# Altium PCB BuckDev.PcbDoc
Units mil, origin at the board's own origin, x right, y up, seen from the top; angles counter-clockwise.
Board outline 1705 x 1603 mil, 2 copper layers (Top Layer, Bottom Layer); 15 components, 6 nets, 37 pads, 197 vias.
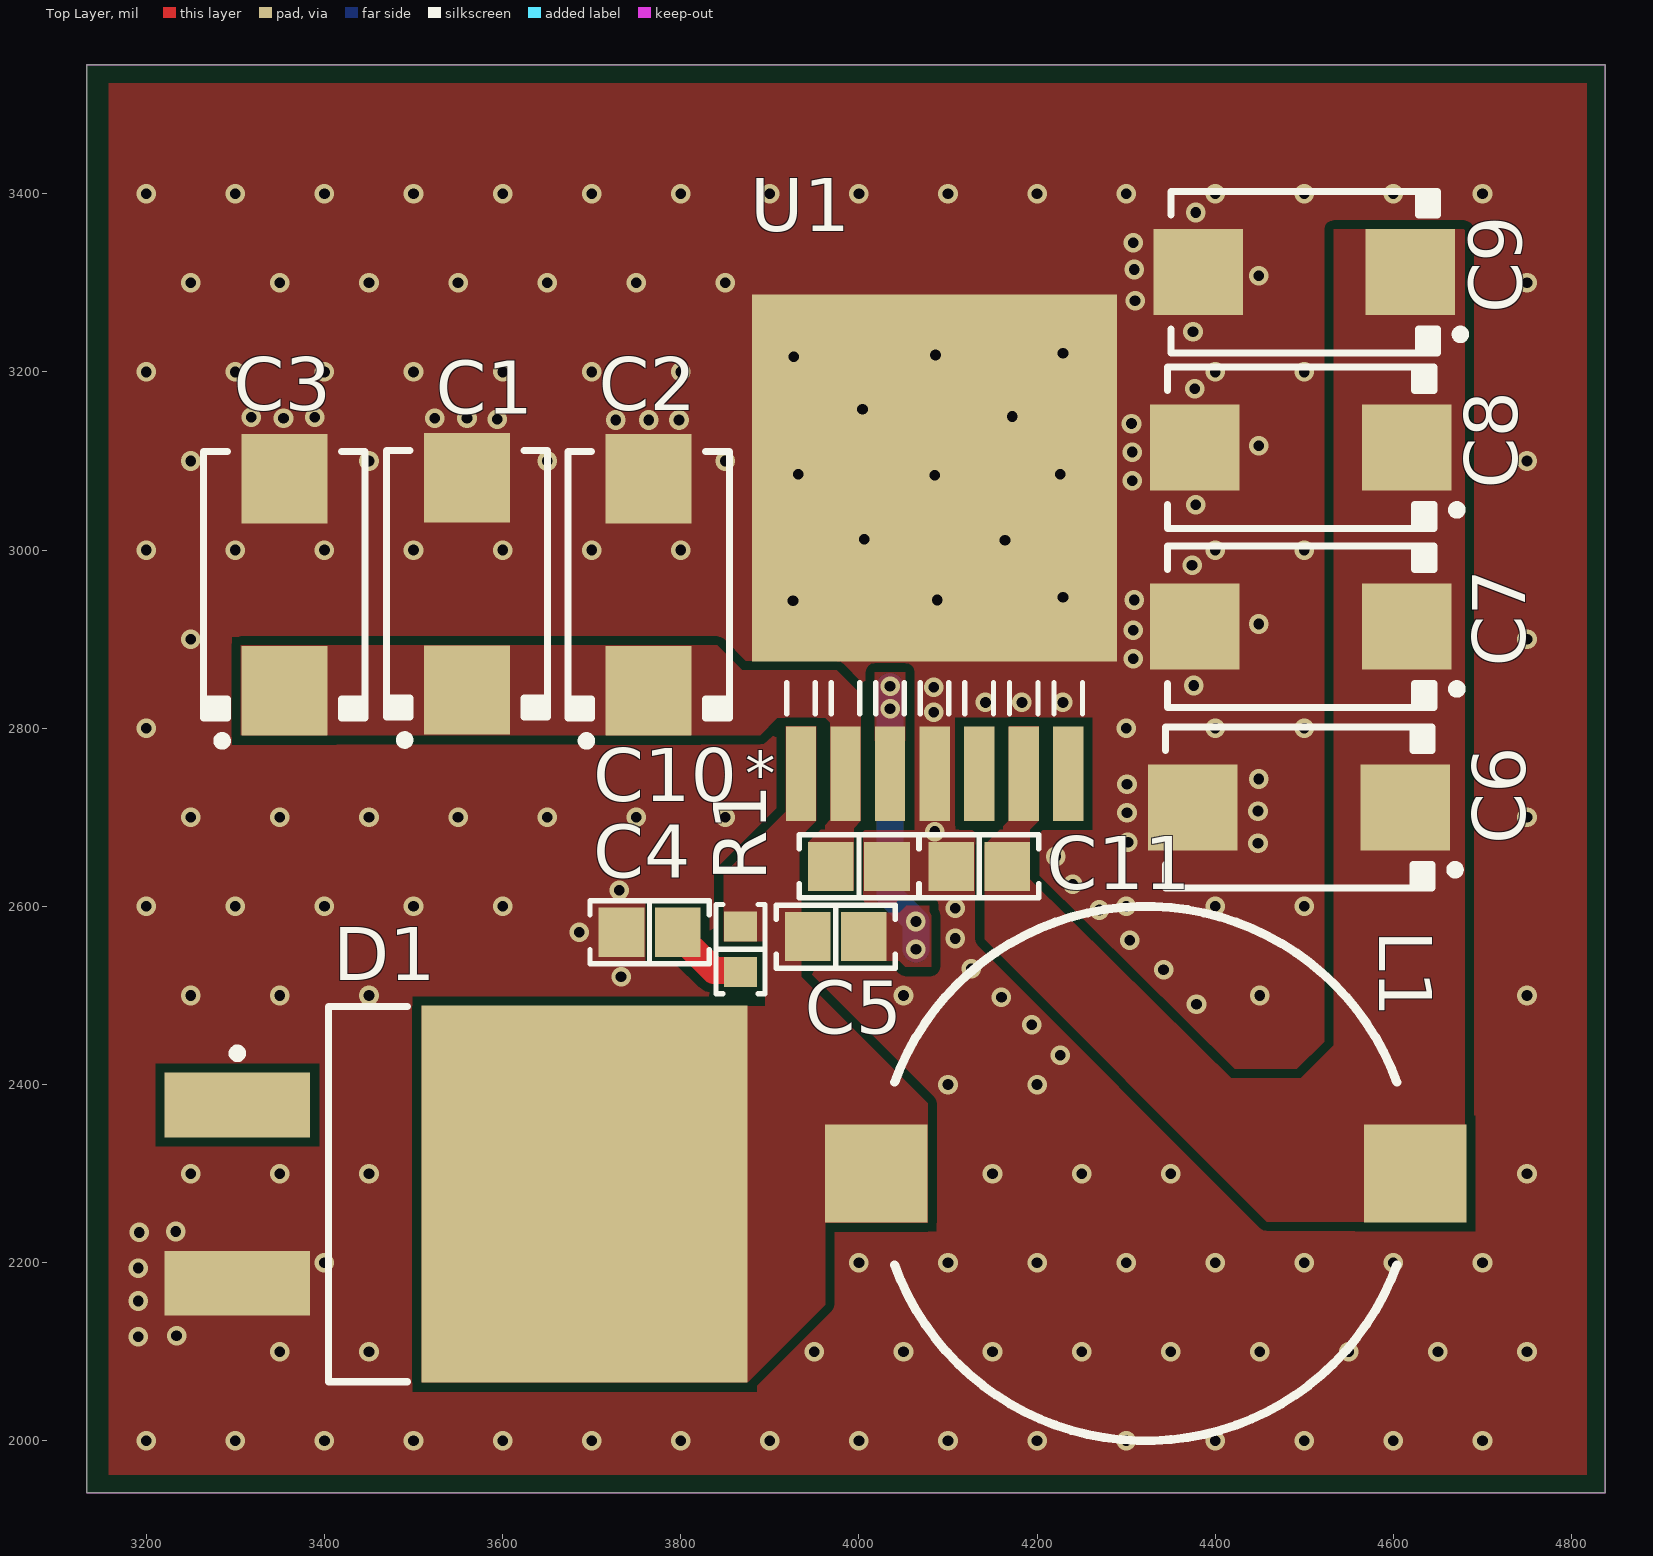
[diagram p0: Top Layer view]
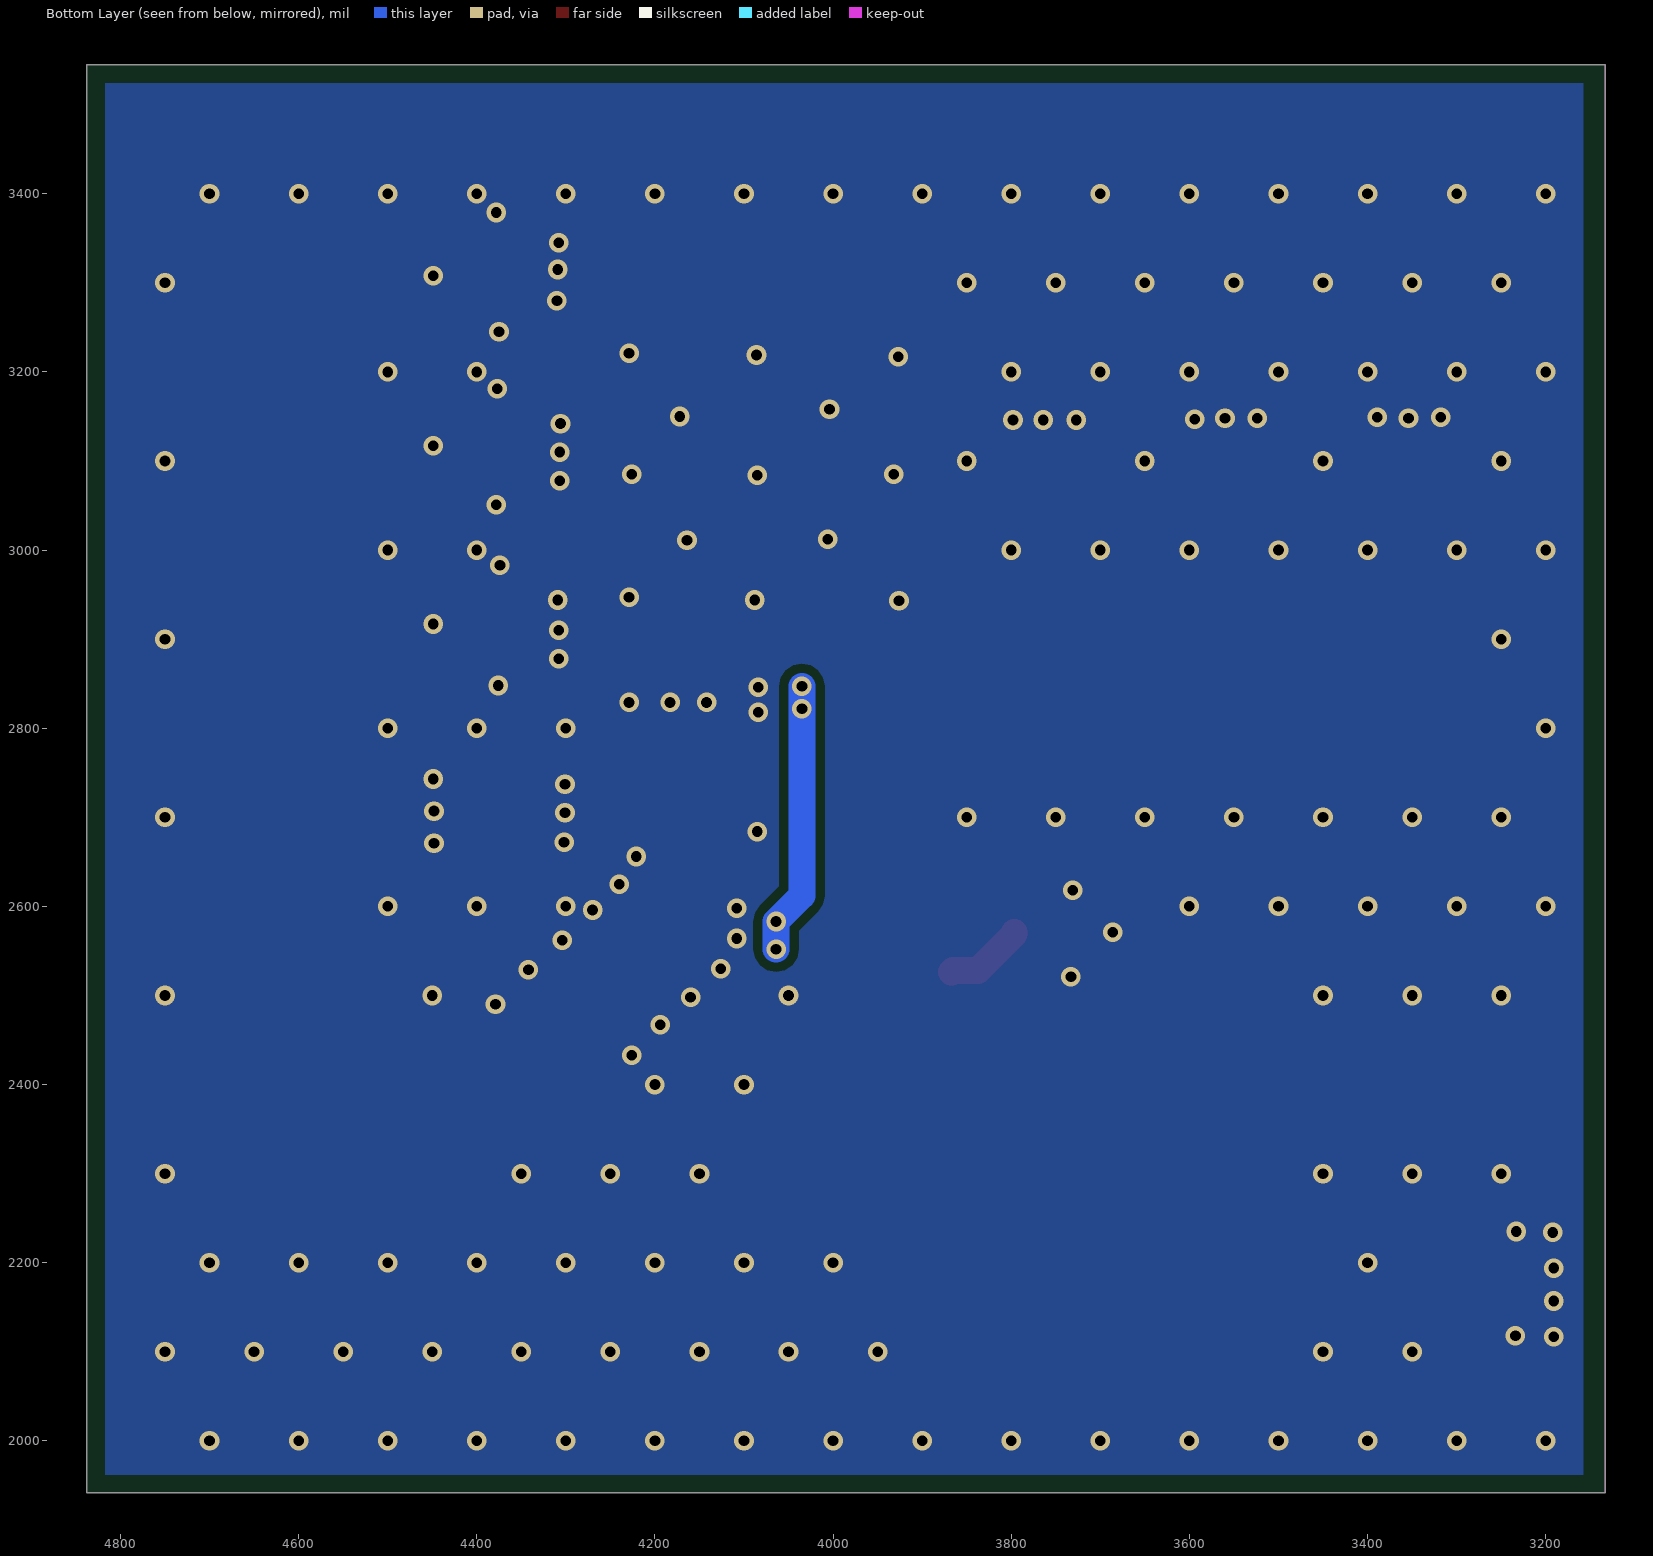
[diagram p1: Bottom Layer view, seen from below]
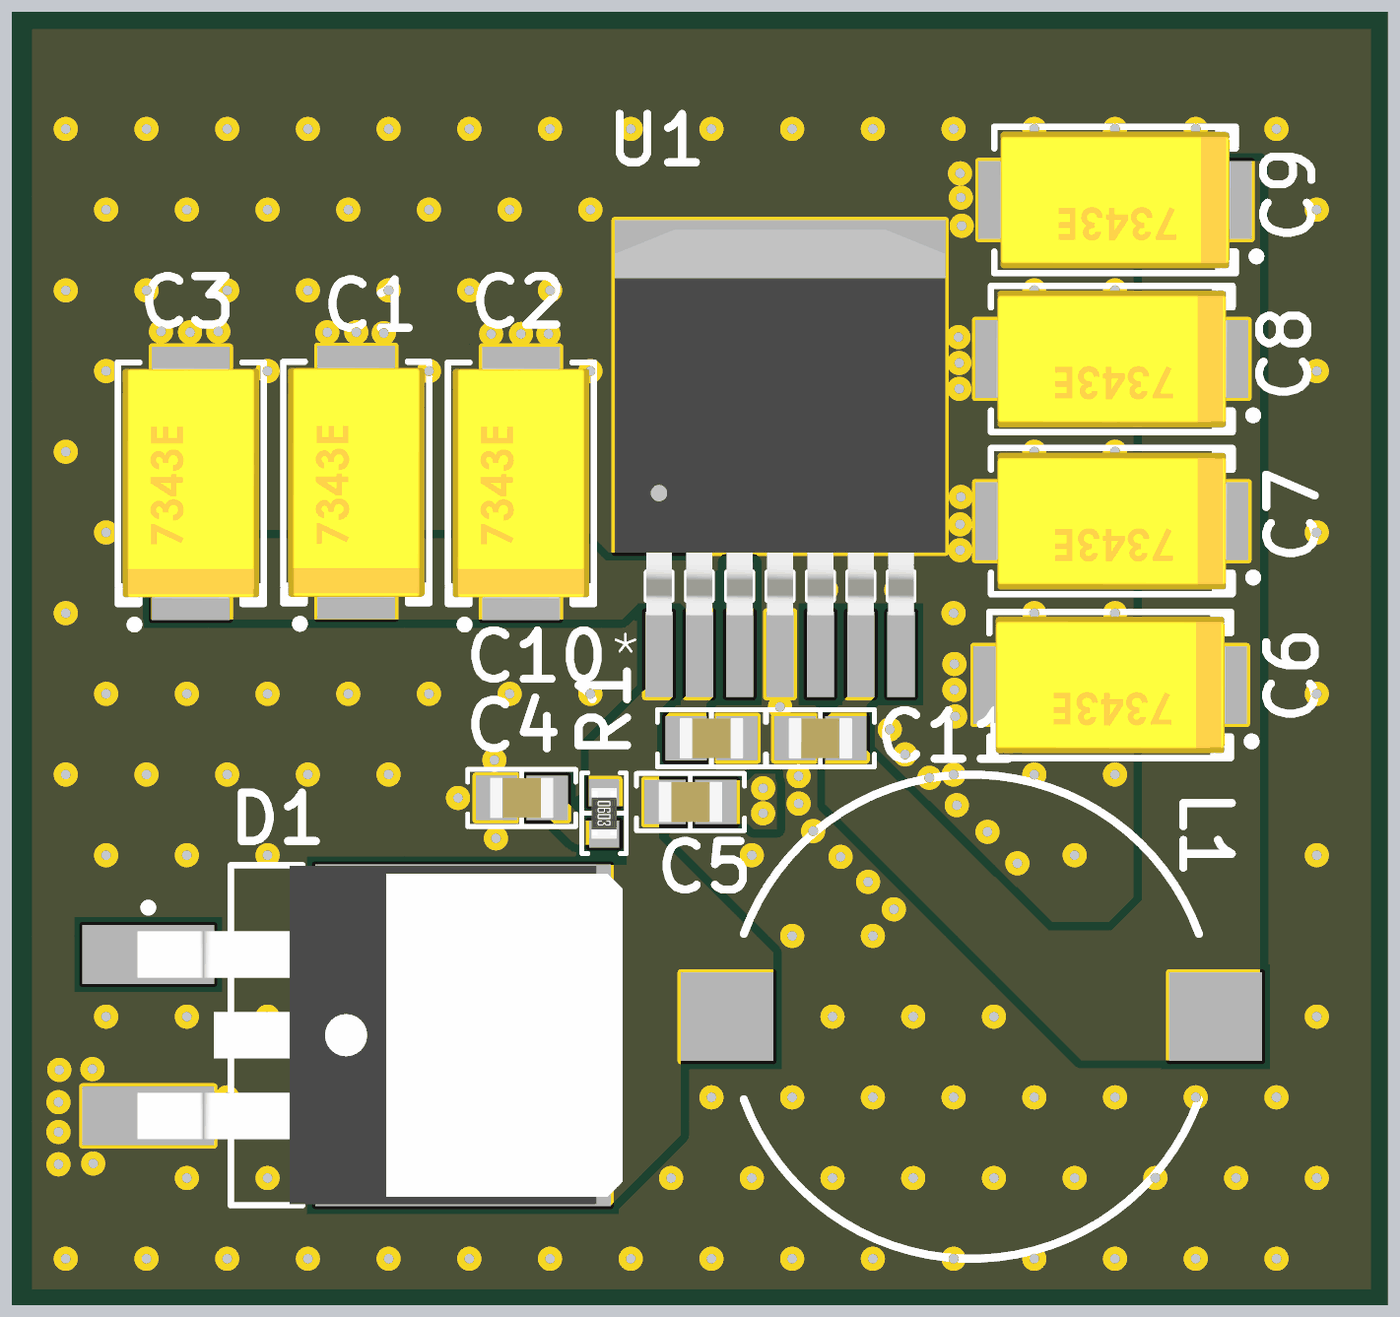
[diagram p2: 3D render of the assembled board from above, using the file's embedded part models]

## Layer stack, top to bottom
Top Solder: solder mask 0.4, Solder Resist, Dk 3.5
Top Layer: signal copper 1.4
Dielectric 1: dielectric 12.6, FR-4, Dk 4.8
Bottom Layer: signal copper 1.4
Bottom Solder: solder mask 0.4, Solder Resist, Dk 3.5

## Board outline
3133,1942 4838,1942 4838,3545 3133,3545

## Design rules (kind name [scope] priority, off if disabled: settings)
Clearance [All] p1: gap=10 ignorepadtopadclearanceinfootprint=FALSE except(0: Arc-Hole Track-Hole SMDPad-Hole THPad-Hole Via-Hole Fill-Hole Poly-Hole Region-Hole Text-Hole)
PlaneConnect [All] p1: planeconnectstyle=Direct reliefexpansion=20 reliefentries=4 reliefconductorwidth=10 reliefairgap=10
PolygonConnect [All] p1: connectstyle=Direct reliefconductorwidth=10 reliefentries=4 polygonreliefangle="90 Angle" airgapwidth=10
RoutingVias [All] p1: holewidth=28 width=50 viastyle="Through Hole" minholewidth=28 minwidth=50 maxholewidth=28 maxwidth=50
SolderMaskExpansion [All] p1: expansion=4 istentingtop=FALSE
Width [All] p1: maxlimit=100 minlimit=10 preferedwidth=10 minimp=50.000000 maximp=50.000000 favimp=50.000000
29 further rules are at their usual default settings.

## Classes and differential pairs
component class BuckCircuit: C1 C2 C3 C4 C5 C6 C7 C8 C9 C10 D1 R1 U1

## Components (designator, comment, footprint, x,y, rotation, side; value= is the part's Value field where it differs from the comment)
C1 "68 µF" "CAP POL 2917_7343" 3560,2962 r90 top
C2 "68 µF" "CAP POL 2917_7343" 3764,2961 r90 top
C3 "68 µF" "CAP POL 2917_7343" 3355,2961 r90 top
C4 "10000 pF" "CAP 0805_2012" 3765,2571 r180 top
C5 "10000 pF" "CAP 0805_2012" 3974,2566 r0 top
C6 "100 µF" "CAP POL 2917_7343" 4494,2711 r180 top
C7 "100 µF" "CAP POL 2917_7343" 4496,2914 r180 top
C8 "100 µF" "CAP POL 2917_7343" 4496,3115 r180 top
C9 "100 µF" "CAP POL 2917_7343" 4500,3312 r180 top
C10 "10000 pF" "CAP 0805_2012" 4000,2645 r180 top
C11 "10000 pF" "CAP 0805_2012" 4135,2645 r0 top
D1 "6TQ045S" "DPAK 6TQ045S" 3548.3,2277 r0 top
L1 "DO5022P-103MLD" DO5022P-103MLD 4322,2300 r0 top
R1 "1 kOhms" "RES 0603_1608" 3867,2552 r270 top
U1 "LM2677SX-5.0/NOPB" TS7B 4085,3075 r0 top

## Footprints (in the part's own frame and the unit in brackets; to place one, negate y for a bottom-side part, rotate by r counter-clockwise, add the part's x,y. Pads: shape width x height; smd on the part's side, far side on the other; paste and mask are expansions set on the pad)
"CAP 0805_2012" [mm] "Chip Capacitor, 2-Leads, Body 2.00x1.20mm, IPC Medium Density"
  rect 1.3x1.4 smd: 1(-0.8,0) 2(0.8,0)
  silkscreen extent -1.7,-0.9 1.7,0.9, body extent -1,-0.64 1,0.64, height 1.26
"CAP POL 2917_7343" [mm] "Molded Capacitor, 2-Leads, Body 7.30x4.30mm, IPC Medium Density"
  rect 2.55x2.45 smd: 1(-3.025,0) 2(3.025,0)
  silkscreen extent -4.57,-2.3 3.8,2.3, body extent -3.65,-2.15 3.65,2.15, height 4.1
DO5022P-103MLD [mm] "10uH"
  rect 2.92x2.79 smd: 1(-7.685,0) 2(7.685,0)
  silkscreen extent -7.16,-7.62 7.16,7.62
"DPAK 6TQ045S" [mm] "D2-PAK, 3-Pads, Body 7.93x8.70mm (max), IPC Medium Density"
  rect 4.15x1.85 smd: 1(-6.25,2.54) 3(-6.25,-2.54)
  rect 9.3x10.75 smd: 2(3.65,0)
  silkscreen extent -6.37,-5.35 -1.4,5.35, body extent -6.59,-5.33 8.67,5.33, height 0.6
"RES 0603_1608" [mm] "Chip Resistor, 2-Leads, Body 1.60x0.80mm, IPC Medium Density"
  rect 0.85x0.95 smd: 1(-0.65,0) 2(0.65,0)
  silkscreen extent -1.27,-0.7 1.27,0.7, body extent -0.8,-0.4 0.8,0.4, height 0.45
TS7B [mil]
  rect 34x106 smd: 1(-150,-326) 2(-100,-326) 3(-50,-326) 4(0,-326) 5(50,-326) 6(100,-326) 7(150,-326)
  rect 410x412 smd: 8(0,6)
  silkscreen extent -166,-259 166,-224, body extent -205,-278 205,200, height 189

## Part data
C1 C2 C3: library part T495D686K020ATE150, "CAP TANT 68UF 10% 20V 2917", Device Package="2917 (7343 Metric)", ESR (Equivalent Series Resistance)=150mOhm, Lifetime @ Temp.="2000 Hrs @ 85°C", Manufacturer=KEMET, Manufacturer Size Code=D, Operating Temperature="-55°C ~ 125°C", Supplier Part Number 1=399-3890-1-ND, Tolerance=±10%, Voltage - Rated="20 V", Capacitance="68 µF", ComponentLink1Description=Datasheet, ComponentLink1URL=https://api.kemet.com/component-edge/download/datasheet/T495D686K020ATE150.pdf, ComponentLink2Description="DigiKey Link", ComponentLink2URL=https://www.digikey.com/en/products/detail/kemet/T495D686K020ATE150/818751, Features="General Purpose", Height - Seated (Max)="0.122\" (3.10mm)", LastUpdated="2022-07-10 9:38:15 AM", Lifecycle Status=Active, Minimum Order=1, Mounting Type="Surface Mount", Package / Case="2917 (7343 Metric)", Packaging=TapeAndReel, Part Number=T495D686K020ATE150, Part Status=Active, PartId=3098, Price=0.71, Series=T495, Size / Dimension="0.287\" L x 0.169\" W (7.30mm x 4.30mm)", Supplier 1=DigiKey, Type=Molded
C4 C5 C10 C11: library part C0805X103J5RACAUTO, "CAP CER 10000PF 50V X7R 0805", Device Package="0805 (2012 Metric)", Manufacturer=KEMET, Operating Temperature="-55°C ~ 125°C", Ratings=AEC-Q200, Supplier Part Number 1=399-C0805X103J5RACAUTOCT-ND, Temperature Coefficient=X7R, Tolerance=±5%, Voltage - Rated=50V, Applications="Automotive, Boardflex Sensitive", Capacitance="10000 pF", ComponentLink1Description=Datasheet, ComponentLink1URL=https://api.kemet.com/component-edge/download/datasheet/C0805X103J5RACAUTO.pdf, ComponentLink2Description="DigiKey Link", ComponentLink2URL=https://www.digikey.com/en/products/detail/kemet/C0805X103J5RACAUTO/6097192, Features="Soft Termination", LastUpdated="2022-06-30 10:06:02 PM", Lifecycle Status=Active, Minimum Order=1, Mounting Type="Surface Mount, MLCC", Package / Case="0805 (2012 Metric)", Packaging=TapeAndReel, Part Number=C0805X103J5RACAUTO, Part Status=Active, PartId=32207, Price=0.10, Series="SMD Auto X7R Flex", Size / Dimension="0.079\" L x 0.049\" W (2.00mm x 1.25mm)", Supplier 1=DigiKey, Thickness (Max)="0.039\" (0.98mm)"
C6 C7 C8 C9: library part T495D107M016ATE100, "CAP TANT 100UF 20% 16V 2917", Device Package="2917 (7343 Metric)", ESR (Equivalent Series Resistance)=100mOhm, Lifetime @ Temp.="2000 Hrs @ 85°C", Manufacturer=KEMET, Manufacturer Size Code=D, Operating Temperature="-55°C ~ 125°C", Supplier Part Number 1=399-5262-1-ND, Tolerance=±20%, Voltage - Rated="16 V", Capacitance="100 µF", ComponentLink1Description=Datasheet, ComponentLink1URL=https://api.kemet.com/component-edge/download/datasheet/T495D107M016ATE100.pdf, ComponentLink2Description="DigiKey Link", ComponentLink2URL=https://www.digikey.com/en/products/detail/kemet/T495D107M016ATE100/1833498, Features="General Purpose", Height - Seated (Max)="0.122\" (3.10mm)", LastUpdated="2022-07-10 9:38:16 AM", Lifecycle Status=Active, Minimum Order=1, Mounting Type="Surface Mount", Package / Case="2917 (7343 Metric)", Packaging=TapeAndReel, Part Number=T495D107M016ATE100, Part Status=Active, PartId=2988, Price=0.77, Series=T495, Size / Dimension="0.287\" L x 0.169\" W (7.30mm x 4.30mm)", Supplier 1=DigiKey, Type=Molded
R1: library part CPF0603B1K0E, "RES SMD 1K OHM 0.1% 1/16W 0603", Device Package="0603 (1608 Metric)", Manufacturer="TE Connectivity Passive Product", Operating Temperature="-55°C ~ 155°C", Power (Watts)="0.063W, 1/16W", Supplier Device Package=0603, Supplier Part Number 1=A119887CT-ND, Temperature Coefficient=±25ppm/°C, Tolerance=±0.1%, ComponentLink1Description=Datasheet, ComponentLink1URL=https://www.te.com/commerce/DocumentDelivery/DDEController?Action=srchrtrv&DocNm=1773200&DocType=DS&DocLang=English, ComponentLink2Description="DigiKey Link", ComponentLink2URL=https://www.digikey.com/en/products/detail/te-connectivity-passive-product/CPF0603B1K0E/2390473, Composition="Thin Film", Height - Seated (Max)="0.022\" (0.55mm)", LastUpdated="2022-08-09 12:17:58 PM", Lifecycle Status=Active, Minimum Order=1, Number of Terminations=2, Package / Case="0603 (1608 Metric)", Packaging=TapeAndReel, Part Number=CPF0603B1K0E, Part Status=Active, PartId=4877, Price=0.10, Resistance="1 kOhms", Series="CPF, Neohm", Size / Dimension="0.061\" L x 0.031\" W (1.55mm x 0.80mm)", Supplier 1=DigiKey
U1: "No Description Available", Mfr_Name="Texas Instruments", Copyright="Copyright (C) 2022 Ultra Librarian. All rights reserved.", Digi-Key_Part_Number_1=2156-LM2677SX-5.0/NOPB-ND, Digi-Key_Part_Number_2=296-48568-1-ND, Digi-Key_Part_Number_3=296-48568-2-ND, Digi-Key_Part_Number_4=296-48568-6-ND, Digi-Key_Part_Number_5=LM2677SX-5.0/NOPB-ND, Manufacturer_Part_Number=LM2677SX-5.0/NOPB, RefDes=RefDes, Type=DEV

## Via types
v1: diameter 22, hole 12, Top Layer to Bottom Layer, 197 vias

## Nets (pads, with @x,y where several pads share a name; then routed paths per layer and width w, separated by ;. In a path a pad name is that pad's centre, name@x,y a point inside that pad or via, vN(x,y) a via of type N, cw(c..) or ccw(c..) an arc to the next point about the centre after c; other vN are vias at no path point)
GND: C1.2 C2.2 C3.2 C4.2 C6.2 C7.2 C8.2 C9.2 C10.1 C11.1 D1.3 U1.4 U1.8
  other v1: 3200,2000 3300,2000 3400,2000 3500,2000 3600,2000 3700,2000 3800,2000 3900,2000 4000,2000 4100,2000 4200,2000 4300,2000 4400,2000 4500,2000 4600,2000 4700,2000 3350,2100 3450,2100 3950,2100 4050,2100 4150,2100 4250,2100 4350,2100 4450,2100 4550,2100 4650,2100 4750,2100 3191,2117 3234,2118 3191,2157 3191,2194 3400,2200 4000,2200 4100,2200 4200,2200 4300,2200 4400,2200 4500,2200 4600,2200 4700,2200 3192,2234 3233,2235 3250,2300 3350,2300 3450,2300 4150,2300 4250,2300 4350,2300 4750,2300 4100,2400 4200,2400 4226,2433 4194,2467 4379,2490 4160,2498 3250,2500 3350,2500 3450,2500 4050,2500 4450,2500 4750,2500 3733,2521 4342,2529 4126,2530 4304,2562 4108,2564 3686,2571 4270,2596 4108,2598 3200,2600 3300,2600 3400,2600 3500,2600 3600,2600 4300,2600 4400,2600 4500,2600 3731,2618 4240,2625 4221,2656 4448,2671 4302,2672 4085,2684 3250,2700 3350,2700 3450,2700 3550,2700 3650,2700 3750,2700 3850,2700 4750,2700 4301,2705 4448,2707 4301,2737 4449,2743 3200,2800 4300,2800 4400,2800 4500,2800 4084,2818 4142,2829 4183,2829 4229,2829 4084,2846 4376,2848 4308,2878 3250,2900 4750,2900 4308,2910 4449,2917 3926,2943 4088,2944 4309,2944 4229,2947 4374,2983 3200,3000 3300,3000 3400,3000 3500,3000 3600,3000 3700,3000 3800,3000 4400,3000 4500,3000 4164,3011 4006,3012 4378,3051 4307,3078 4085,3084 3932,3085 4226,3085 3250,3100 3450,3100 3650,3100 3850,3100 4750,3100 4307,3110 4449,3117 4306,3142 3727,3146 3764,3146 3798,3146 3594,3147 3354,3148 3524,3148 3560,3148 3318,3149 3389,3149 4172,3150 4004,3158 4377,3181 3200,3200 3300,3200 3400,3200 3500,3200 3600,3200 3700,3200 3800,3200 4400,3200 4500,3200 3927,3217 4086,3219 4229,3221 4375,3245 4310,3280 3250,3300 3350,3300 3450,3300 3550,3300 3650,3300 3750,3300 3850,3300 4750,3300 4449,3308 4309,3315 4308,3345 4378,3379 3200,3400 3300,3400 3400,3400 3500,3400 3600,3400 3700,3400 3800,3400 3900,3400 4000,3400 4100,3400 4200,3400 4300,3400 4400,3400 4500,3400 4600,3400 4700,3400
NetC1_1: C1.1 C2.1 C3.1 C10.2 U1.2
NetC4_1: C4.1 R1.2 | length 90.1
  Top Layer w30: C4.1 3796.5,2569.03 3837.39,2528.14 3865.27,2528.14 R1.2
NetC5_1: C5.1 D1.2 L1.1 R1.1 U1.1
NetC5_2: C5.2 U1.3 | length 307
  Bottom Layer w30: v1(4035,2847) v1(4035,2822) 4035,2612 v1(4064,2583) v1(4064,2552)
NetC6_1: C6.1 C7.1 C8.1 C9.1 C11.2 L1.2 U1.6
pads on no net: D1.1 U1.5 U1.7

## Polygon pours and split planes (outlines as drawn)
GND on Top Layer "GND_L01_P016" (solid, pour order 16): 3158,3524 4817,3524 4817,1962 3158,1962
NetC5_1 on Top Layer "NETC5_1_L01_P013" (solid, pour order 13): 3509,2488 3925,2488 3925,2454 4015,2364 3962,2311 3962,2153 3875,2066 3509,2066
NetC5_2 on Top Layer "NETC5_2_L01_P012" (solid, pour order 12): 3980,2593 4045,2593 4053,2601 4081,2601 4081,2532 4052,2532 4045,2539 3980,2539
NetC5_2 on Top Layer "NETC5_2_L01_P011" (solid, pour order 11): 4018,2786 4018,2863 4052,2863 4052,2786
NetC6_1 on Top Layer "NETC6_1_L01_P010" (solid, pour order 10): 4412,2407 4412,2403 4569,2246 4680,2246 4680,3359 4679,3360 4533,3360 4533,2444 4496,2407
NetC1_1 on Top Layer "NETC1_1_L01_P008" (solid, pour order 8): 3306,2792 3889,2792 3909,2812 3962,2812 3968,2806 3968,2697 4001,2697 4002,2696 4002,2838 3975,2865 3869,2865 3841,2893 3306,2893
NetC6_1 on Top Layer "NETC6_1_L01_P007" (solid, pour order 7): 4191,2670 4192,2669 4192,2642 4192,2630.42 4470.56,2355 4568,2355 4681,2355 4681,2245 4680,2246 4458,2246 4141,2563 4141,2669
NetC5_1 on Top Layer "NETC5_1_L01_P004" (solid, pour order 4): 3918,2802 3952,2802 3952,2696 3935,2679 3935,2521 4077,2379 4077,2245 3962,2245 3962,2358 3895,2425 3895,2561 3848,2561 3848,2636 3918,2706
NetC1_1 on Top Layer "NETC1_1_L01_P003" (solid, pour order 3): 3943,2672 3968,2697 3968,2802 4002,2802 4002,2696 3994,2688 3994,2618 3943,2618
GND on Top Layer "GND_L01_P002" (solid, pour order 2): 4007,2672 4129,2672 4129,2618 4007,2618
NetC6_1 on Top Layer "NETC6_1_L01_P001" (solid, pour order 1): 4168,2802 4168,2696 4141,2669 4141,2618 4191,2618 4192,2619 4192,2686 4202,2696 4202,2802
GND on Top Layer "GND_L01_P000" (solid, pour order 0): 4068,2802 4102,2802 4102,2696 4126,2672 4129,2672 4129,2618 4078,2618 4078,2686 4068,2696
GND on Bottom Layer "GND_L02_P017" (solid, pour order 17): 3158,3524 4817,3524 4817,1962 3158,1962

## Keep-outs
Keep-Out Layer:
  the board outline again, w1

## Text inside footprints (layer, text, board x,y; h text height)
U1: Top Overlay "*" at 3872.5,2724 h50; Mechanical 13 "*" at 3872.5,2724 h50